# Altium PCB Motor1.PcbDoc (part 2 of 2)
Units mm, origin at the board's own origin, x right, y up, seen from the top; angles counter-clockwise.
Board outline 127 x 101.6 mm, 4 copper layers (Top Layer, Internal Plane 1, Internal Plane 2, Bottom Layer), stack 0.462 mm thick; 168 components, 160 nets, 542 pads, 14 vias.
Unrouted connection lines stored in the file: 162.
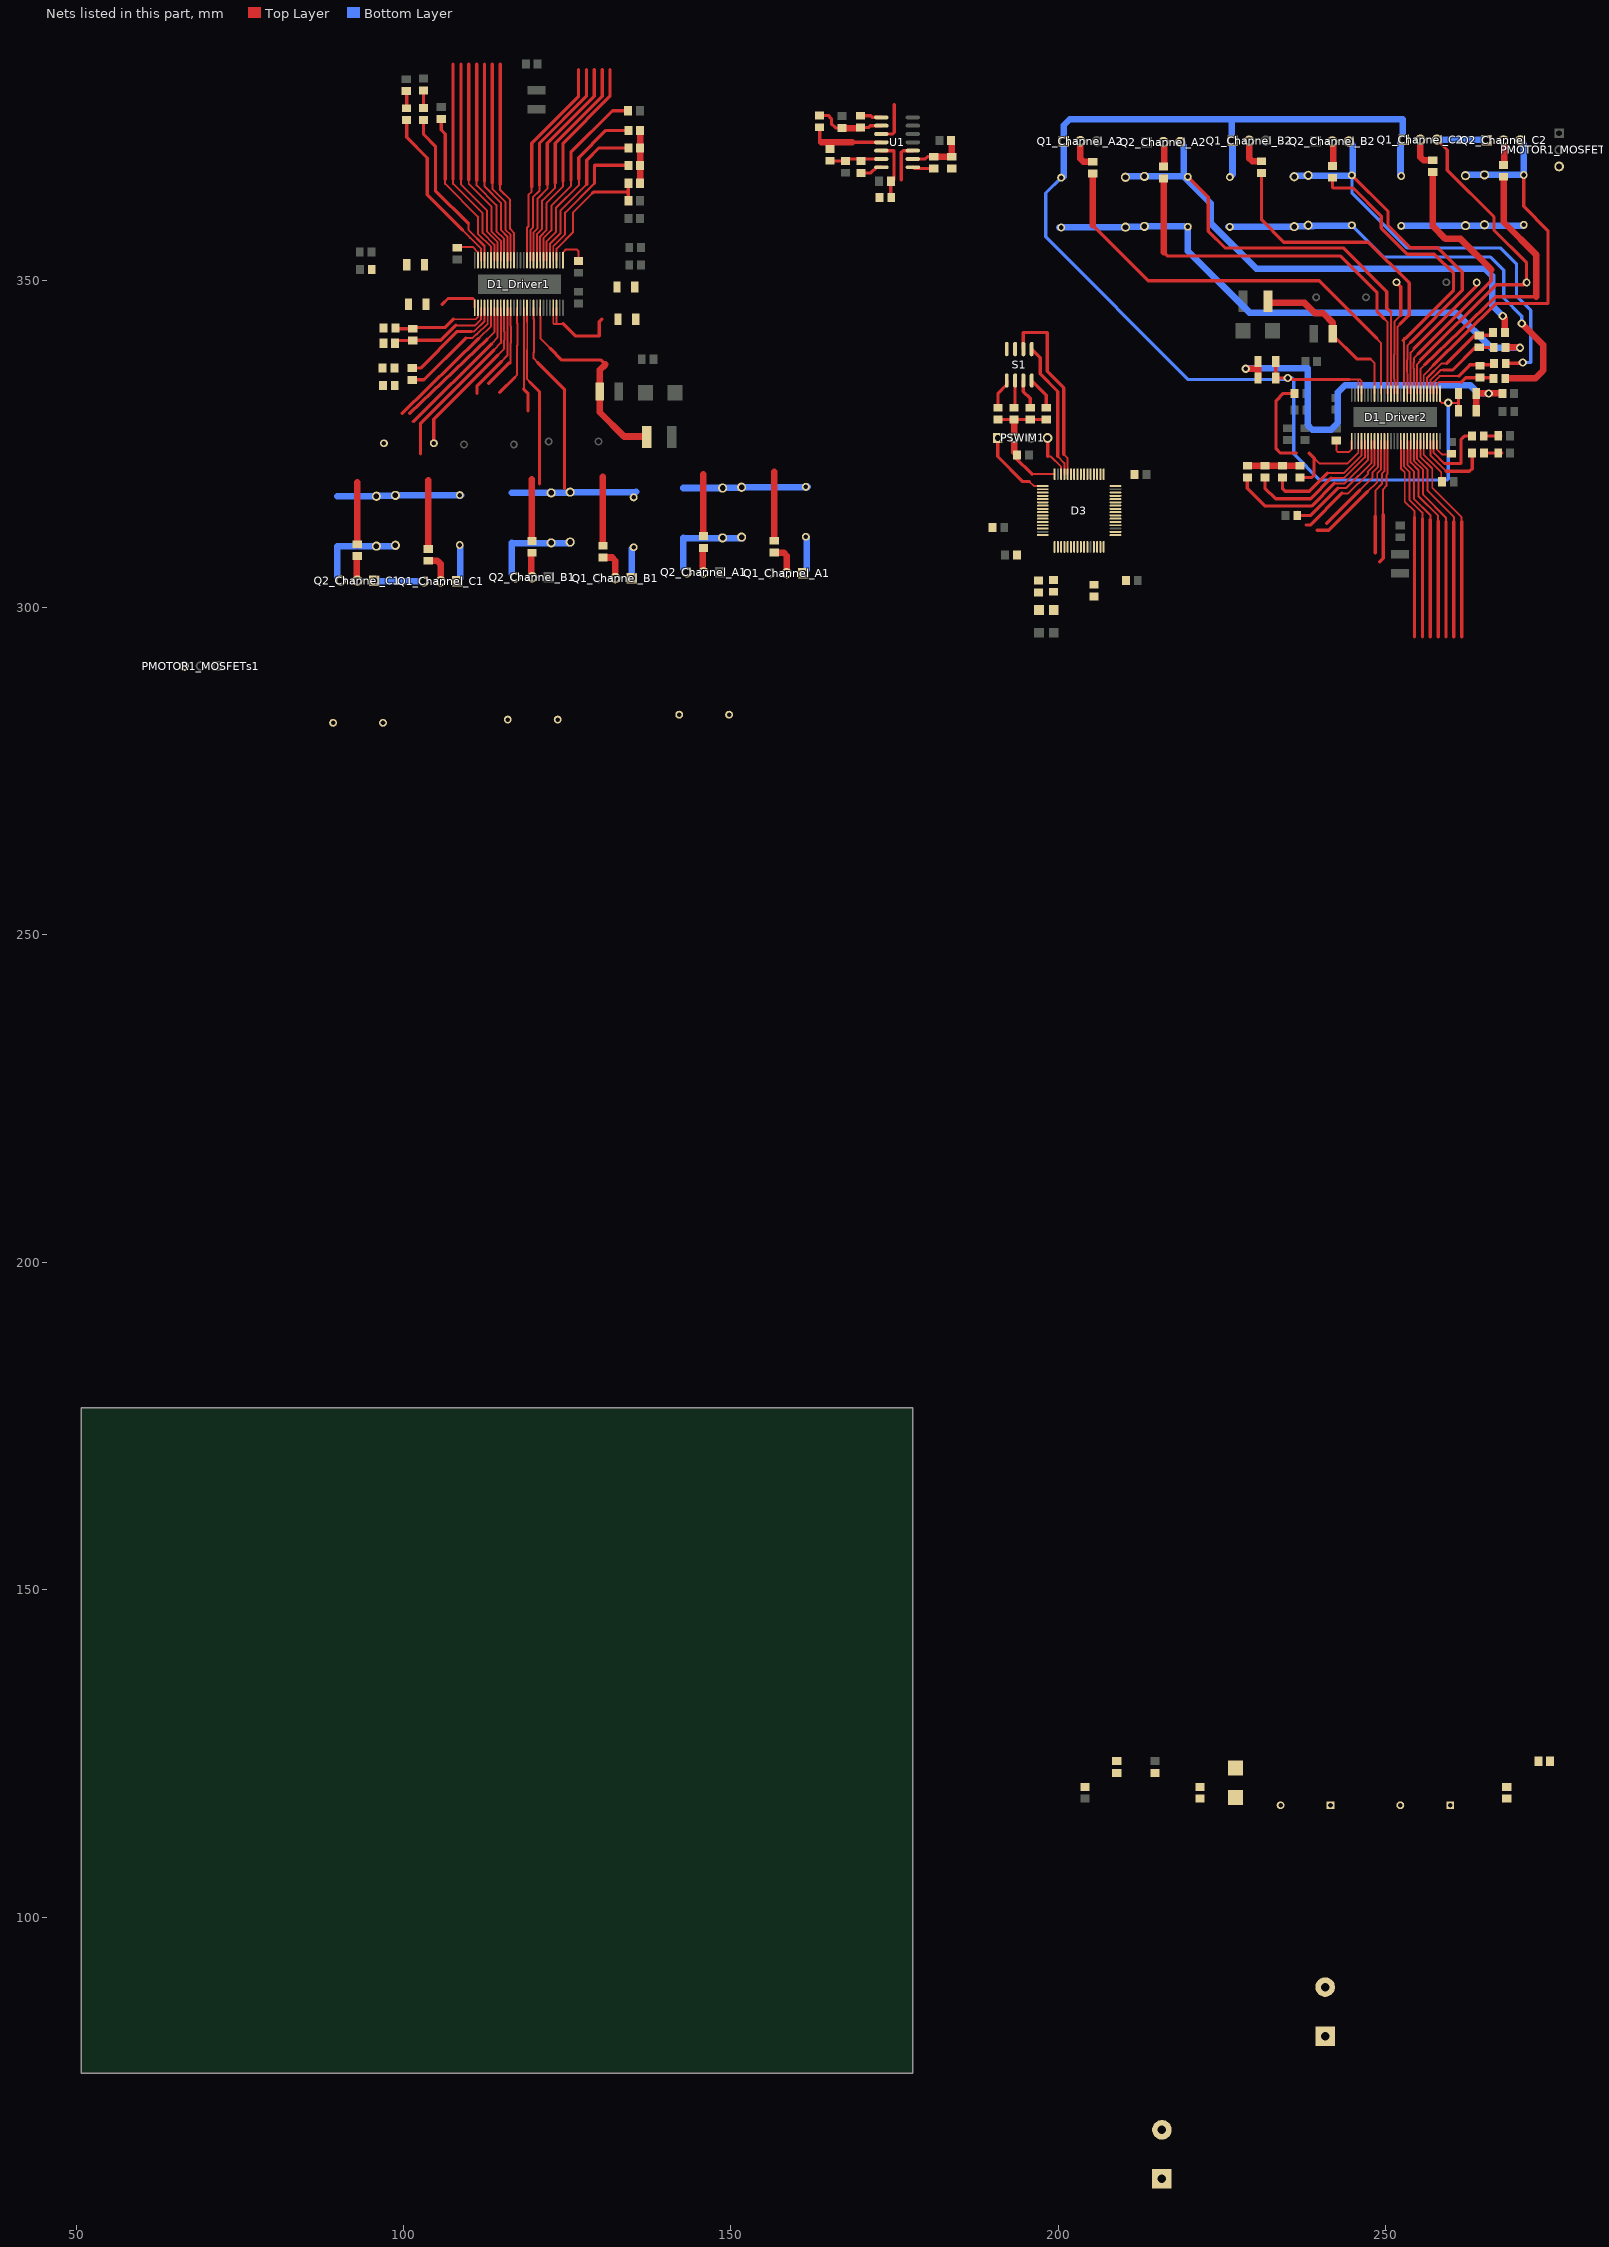
[diagram p4: the nets of this part, all layers, seen from the top]

## Via types
v1: diameter 1.27, hole 0.711, Top Layer to Bottom Layer, 12 vias
v2: diameter 0.5, hole 0.2, Top Layer to Bottom Layer, 2 vias

## Nets (pads, with @x,y where several pads share a name; then routed paths per layer and width w, separated by ;. In a path a pad name is that pad's centre, name@x,y a point inside that pad or via, vN(x,y) a via of type N, cw(c..) or ccw(c..) an arc to the next point about the centre after c; other vN are vias at no path point) (continued)
NetC13_Driver2_2: C13_Driver2.2 D1_Driver2.43 | length 17.8
  Top Layer w0.3: D1_Driver2.43@251.295,332.65 251.295,334.843 251.28,334.858 251.28,335.209 251.263,335.225 251.263,338.621 251.295,338.653 251.295,343.657 252.207,344.569
  Top Layer w0.5: C13_Driver2.2@251.42,349.75 251.895,349.275 251.97,349.275 252.27,348.975 252.27,344.632
NetC14_Driver1_1: C14_Driver1.1 D1_Driver1.36 PMOTOR1_MOSFETs1.3 Q1_Channel_C1.3 Q2_Channel_C1.1 | length 30.4
  Top Layer w0.3: 113.403,340.192 114.371,341.287 D1_Driver1.36@114.371,345.761
  Top Layer w0.5: 101.465,328.381 113.403,340.192
  Bottom Layer w1: Q2_Channel_C1.1@95.51,304.109 95.637,303.982 Q1_Channel_C1.3@103.13,303.982
NetC14_Driver1_2: C14_Driver1.2 D1_Driver1.38 | length 25.2
  Top Layer w0.3: 114.419,338.541 115.371,339.493 115.371,340.794 115.403,340.825 115.403,342.15 115.386,342.167 115.386,342.518 115.371,342.533 D1_Driver1.38@115.371,345.761
  Top Layer w0.5: C14_Driver1.2@104.64,325.079 104.64,328.762 114.419,338.541
NetC14_Driver2_1: C14_Driver2.1 D1_Driver2.36 PMOTOR1_MOSFETs2.3 Q1_Channel_C2.3 Q2_Channel_C2.1 | length 61.5
  Top Layer w0.3: D1_Driver2.36@254.795,332.65 254.795,337.124 255.763,338.219
  Top Layer w0.5: 255.313,337.844 266.881,349.289 271.006,349.289 C14_Driver2.1@271.045,349.25 ; Q1_Channel_C2.3@257.818,371.435 259.4,369.853 259.4,366.75 266.525,359.625 266.525,357.575 271.495,352.605 C14_Driver2.1@271.495,349.625
  Bottom Layer w1: Q1_Channel_C2.3@257.818,371.435 265.311,371.435 Q2_Channel_C2.1@265.438,371.308
NetC14_Driver2_2: C14_Driver2.2 D1_Driver2.38 | length 21.5
  Top Layer w0.3: D1_Driver2.38@253.795,332.65 253.795,335.878 253.78,335.893 253.78,336.244 253.763,336.261 253.763,337.586 253.795,337.617 253.795,338.918 254.747,339.87
  Top Layer w0.5: 254.297,339.495 C14_Driver2.2@264.076,349.274
NetC15_Driver1_2: C15_Driver1.2 D1_Driver1.23 | length 24.7
  Top Layer w0.3: 106.371,365.369 106.371,364.694 111.371,359.694 111.371,357.069 113.371,355.069 D1_Driver1.23@113.371,353.011
  Top Layer w0.5: C15_Driver1.2@105.759,374.606 105.759,372.906 106.371,372.294 106.371,365.369
NetC15_Driver2_2: C15_Driver2.2 D1_Driver2.23 | length 7.8
  Top Layer w0.3: D1_Driver2.23@255.795,325.4 255.795,323.342 258.47,320.667 C15_Driver2.2@258.47,318.717
NetC16_Driver1_1: C16_Driver1.1 D1_Driver1.32 R16_Driver1.2 | length 16
  Top Layer w0.3: 110.38,342.152 110.805,342.152 112.371,343.718 D1_Driver1.32@112.371,345.761
  Top Layer w0.5: C16_Driver1.1@101.334,336.556 102.609,336.556 108.205,342.152 110.38,342.152
NetC16_Driver1_2: C16_Driver1.2 D1_Driver1.33 R13_Driver1.2 | length 17.5
  Top Layer w0.3: 109.509,341.131 110.534,341.131 111.088,341.685 111.213,341.685 112.871,343.343 D1_Driver1.33@112.871,345.761
  Top Layer w0.5: C16_Driver1.2@101.334,334.756 103.134,334.756 109.509,341.131
NetC16_Driver2_1: C16_Driver2.1 D1_Driver2.32 R16_Driver2.2 | length 13.8
  Top Layer w0.3: D1_Driver2.32@256.795,332.65 256.795,334.693 258.361,336.259 258.786,336.259
  Top Layer w0.5: 258.786,336.259 260.204,336.259 263.645,339.7 R16_Driver2.2@266.495,339.7
NetC16_Driver2_2: C16_Driver2.2 D1_Driver2.33 R13_Driver2.2 | length 15.3
  Top Layer w0.3: D1_Driver2.33@256.295,332.65 256.295,335.036 258.539,337.28 259.325,337.28
  Top Layer w0.5: 259.325,337.28 263.595,341.55 R13_Driver2.2@266.545,341.55
NetC17_Driver1_1: C17_Driver1.1 D1_Driver1.30 R18_Driver1.2 | length 14
  Top Layer w0.3: 107.613,344.006 111.059,344.006 111.371,344.318 D1_Driver1.30@111.371,345.761
  Top Layer w0.5: R18_Driver1.2@99.334,342.556 C17_Driver1.1@101.409,342.556 ; C17_Driver1.1@101.534,342.756 106.363,342.756 107.613,344.006
NetC17_Driver1_2: C17_Driver1.2 D1_Driver1.31 R17_Driver1.2 | length 15.5
  Top Layer w0.3: 108.009,343.081 110.934,343.081 111.871,344.018 D1_Driver1.31@111.871,345.761
  Top Layer w0.5: R17_Driver1.2@99.334,340.756 C17_Driver1.2@101.409,340.756 ; C17_Driver1.2@101.534,340.781 105.709,340.781 108.009,343.081
NetC17_Driver2_1: C17_Driver2.1 D1_Driver2.30 R18_Driver2.2 | length 10.2
  Top Layer w0.3: D1_Driver2.30@257.795,332.65 257.795,334.093 258.107,334.405 261.553,334.405
  Top Layer w0.5: 261.553,334.405 262.228,335.08 ; 262.195,335.08 262.228,335.08 ; R18_Driver2.2@266.07,335.08 262.228,335.08
NetC17_Driver2_2: C17_Driver2.2 D1_Driver2.31 R17_Driver2.2 | length 11.8
  Top Layer w0.3: D1_Driver2.31@257.295,332.65 257.295,334.393 258.232,335.33 261.157,335.33
  Top Layer w0.5: 261.157,335.33 262.882,337.055 ; 262.82,337.055 262.882,337.055 ; R17_Driver2.2@266.195,337.055 262.882,337.055
NetC18_Driver1_2: C18_Driver1.2 D3.9 R15_Driver1.2 | length 2.6
  Top Layer w0.5: C18_Driver1.2@100.434,378.856 100.484,378.806 R15_Driver1.2@100.484,376.231
NetC18_Driver2_2: C18_Driver2.2 D3.17 R15_Driver2.2 | length 2.6
  Top Layer w0.5: R15_Driver2.2@264.965,326.162 267.54,326.162 C18_Driver2.2@267.59,326.212
NetC19_Driver1_2: C19_Driver1.2 D3.8 R14_Driver1.2 | length 2.7
  Top Layer w0.5: R14_Driver1.2@103.059,376.256 C19_Driver1.2@103.059,378.956
NetC19_Driver2_2: C19_Driver2.2 D3.11 R14_Driver2.2 | length 2.7
  Top Layer w0.5: R14_Driver2.2@264.99,323.587 C19_Driver2.2@267.69,323.587
NetC20_Driver1_2: C20_Driver1.2 D1_Driver1.27 | length 4.8
  Top Layer w0.3: C20_Driver1.2@108.209,354.931 108.328,355.05 110.59,355.05 111.371,354.269 D1_Driver1.27@111.371,353.011
NetC20_Driver2_2: C20_Driver2.2 D1_Driver2.27 | length 3.8
  Top Layer w0.3: D1_Driver2.27@257.795,325.4 257.795,324.142 258.576,323.361 C20_Driver2.2@260.045,323.361
NetC23_1: C23.1 R22.1
NetC27_2: C27.2 D3.22 D4.1
NetD1_Driver1_1: D1_Driver1.1 R10_Driver1.1 | length 5.4
  Top Layer w0.3: D1_Driver1.1@124.371,353.011 124.371,354.235 124.817,354.681 126.468,354.681 126.722,354.427 R10_Driver1.1@126.722,352.914
NetD1_Driver1_3: D1_Driver1.3 R6_Driver1.1 R11_Driver1.2 | length 20.8
  Top Layer w0.3: D1_Driver1.3@123.371,353.011 123.371,354.793 125.909,357.331 125.909,360.331 128.909,363.331
  Top Layer w0.5: 128.909,363.331 129.009,363.431 134.34,363.431 ; R11_Driver1.2@134.34,362.101 134.34,363.431 ; R6_Driver1.1@134.34,364.787 134.34,363.431
NetD1_Driver1_4: D1_Driver1.4 R9_Driver1.1 | length 22.3
  Top Layer w0.3: D1_Driver1.4@122.871,353.011 122.871,355.168 124.671,356.968 124.671,360.293 129.171,364.793
  Top Layer w0.5: 129.171,364.793 129.171,367.531 134.281,367.531 R9_Driver1.1@134.34,367.472
NetD1_Driver1_5: D1_Driver1.5 D3.5 R8_Driver1.1 | length 24.7
  Top Layer w0.3: D1_Driver1.5@122.371,353.011 122.371,355.5 123.971,357.1 123.971,360.593 127.971,364.593
  Top Layer w0.5: 127.971,364.593 127.971,368.293 129.835,370.157 R8_Driver1.1@134.34,370.157
NetD1_Driver1_6: D1_Driver1.6 D3.6 R7_Driver1.1 | length 27
  Top Layer w0.3: D1_Driver1.6@121.871,353.011 121.871,355.893 123.271,357.293 123.271,360.993 126.771,364.493 126.771,365.431
  Top Layer w0.5: 126.771,365.431 126.771,368.693 130.92,372.842 R7_Driver1.1@134.34,372.842
NetD1_Driver1_7: D1_Driver1.7 R12_Driver1.1 | length 29.6
  Top Layer w0.3: D1_Driver1.7@121.371,353.011 121.371,356.368 122.571,357.568 122.571,361.343 125.571,364.343 125.571,365.231
  Top Layer w0.5: 125.571,365.231 125.571,369.493 131.917,375.839 R12_Driver1.1@134.304,375.839
NetD1_Driver1_8: D1_Driver1.8 D3.54 | length 33.5
  Top Layer w0.3: D1_Driver1.8@120.871,353.011 120.871,356.643 121.871,357.643 121.871,361.793 124.371,364.293 124.371,365.031
  Top Layer w0.5: 124.371,365.031 124.371,370.906 131.534,378.069 131.534,382.131
NetD1_Driver1_9: D1_Driver1.9 D1_Driver2.9 D3.57 | length 49
  Top Layer w0.3: D1_Driver1.9@120.371,353.011 120.371,356.993 121.171,357.793 121.171,362.118 123.171,364.118 123.171,364.831 ; 245.995,317.875 247.995,319.875 247.995,320.618 248.795,321.418 D1_Driver2.9@248.795,325.4
  Top Layer w0.5: 123.171,364.831 123.171,370.906 130.334,378.069 130.334,382.131 ; 240.995,312.875 245.995,317.875
NetD1_Driver1_10: D1_Driver1.10 D1_Driver2.10 D3.56 | length 51.7
  Top Layer w0.3: D1_Driver1.10@119.871,353.011 119.871,357.293 120.471,357.893 120.471,362.443 121.971,363.943 121.971,364.631 ; 247.195,317.65 248.695,319.15 248.695,320.518 249.295,321.118 D1_Driver2.10@249.295,325.4
  Top Layer w0.5: 121.971,364.631 121.971,370.906 129.134,378.069 129.134,382.131 ; 239.545,311.775 241.32,311.775 247.195,317.65
NetD1_Driver1_11: D1_Driver1.11 D1_Driver2.11 D3.55 | length 50.3
  Top Layer w0.3: D1_Driver1.11@119.371,353.011 119.371,357.593 119.771,357.993 119.771,362.643 120.771,363.643 120.771,364.431 ; 248.395,313.98 248.395,317.85 249.395,318.85 249.395,320.418 249.795,320.818 D1_Driver2.11@249.795,325.4
  Top Layer w0.5: 120.771,364.431 120.771,370.906 127.934,378.069 127.934,382.131 ; 248.395,308.3 248.395,313.98
NetD1_Driver1_12: D1_Driver1.12 D3.62 | length 32.4
  Top Layer w0.3: D1_Driver1.12@118.871,353.011 118.871,357.993 119.071,358.193 119.071,362.993 119.571,363.493 119.571,364.231
  Top Layer w0.5: 119.571,364.231 119.571,370.906 126.734,378.069 126.734,382.131
NetD1_Driver1_16: D1_Driver1.16 D3.4 | length 30.8
  Top Layer w0.3: 114.771,364.631 114.771,363.744 116.271,362.244 116.271,357.794 116.871,357.194 D1_Driver1.16@116.871,353.011
  Top Layer w0.5: 114.771,364.631 114.771,382.931
NetD1_Driver1_17: D1_Driver1.17 D3.41 | length 31.1
  Top Layer w0.3: 113.571,364.831 113.571,363.944 115.571,361.944 115.571,357.694 116.371,356.894 D1_Driver1.17@116.371,353.011
  Top Layer w0.5: 113.571,364.831 113.571,382.931
NetD1_Driver1_18: D1_Driver1.18 D3.34 | length 31.4
  Top Layer w0.3: 112.371,365.031 112.371,364.294 114.871,361.794 114.871,357.644 115.871,356.644 D1_Driver1.18@115.871,353.011
  Top Layer w0.5: 112.371,365.031 112.371,382.931
NetD1_Driver1_19: D1_Driver1.19 D3.42 | length 31.7
  Top Layer w0.3: 111.171,365.231 111.171,364.444 114.171,361.444 114.171,357.469 115.371,356.269 D1_Driver1.19@115.371,353.011
  Top Layer w0.5: 111.171,365.231 111.171,382.931
NetD1_Driver1_20: D1_Driver1.20 D3.35 | length 31.9
  Top Layer w0.3: 109.971,365.294 109.971,364.694 113.471,361.194 113.471,357.394 114.871,355.994 D1_Driver1.20@114.871,353.011
  Top Layer w0.5: 109.971,365.294 109.971,382.931
NetD1_Driver1_21: D1_Driver1.21 D3.43 | length 32.2
  Top Layer w0.3: 108.771,365.344 108.771,364.594 112.771,360.594 112.771,357.381 114.371,355.781 D1_Driver1.21@114.371,353.011
  Top Layer w0.5: 108.771,365.344 108.771,382.931
NetD1_Driver1_22: D1_Driver1.22 D3.36 | length 32.5
  Top Layer w0.3: 107.571,365.344 107.571,364.669 112.071,360.169 112.071,357.194 113.871,355.394 D1_Driver1.22@113.871,353.011
  Top Layer w0.5: 107.571,365.344 107.571,382.931
NetD1_Driver1_24: D1_Driver1.24
NetD1_Driver1_25: D1_Driver1.25 R14_Driver1.1 | length 25.3
  Top Layer w0.3: 109.934,358.556 109.934,357.631 112.371,355.194 D1_Driver1.25@112.371,353.011
  Top Layer w0.5: R14_Driver1.1@103.059,374.456 103.059,372.256 104.884,370.431 104.884,363.606 109.934,358.556
NetD1_Driver1_26: D1_Driver1.26 R15_Driver1.1 | length 26.2
  Top Layer w0.3: 108.984,357.656 110.209,356.431 110.187,356.431 111.871,354.747 D1_Driver1.26@111.871,353.011
  Top Layer w0.5: R15_Driver1.1@100.484,374.431 100.484,371.781 103.634,368.631 103.634,363.006 108.984,357.656
NetD1_Driver1_35: D1_Driver1.35 R2_Channel_C1.1 | length 31.2
  Top Layer w0.3: 112.768,340.954 113.871,342.057 D1_Driver1.35@113.871,345.761
  Top Layer w0.5: 100.957,329.651 112.768,340.954
  Top Layer w1: R2_Channel_C1.1@92.925,309.525 92.925,319.075
NetD1_Driver1_37: D1_Driver1.37 R1_Channel_C1.1 | length 38
  Top Layer w0.3: 113.784,339.303 114.871,340.39 114.871,341.001 114.903,341.033 114.903,341.943 114.886,341.96 114.886,342.311 114.871,342.326 D1_Driver1.37@114.871,345.761
  Top Layer w0.5: 102.608,323.428 102.608,328.127 113.784,339.303
  Top Layer w1: R1_Channel_C1.1@103.775,308.925 103.775,319.45
NetD1_Driver1_40: D1_Driver1.40 R2_Channel_B1.1 | length 22.7
  Top Layer w0.3: 116.07,337.271 116.371,337.271 116.371,340.38 116.403,340.411 116.403,342.565 116.386,342.581 116.386,342.932 116.371,342.947 D1_Driver1.40@116.371,345.761
  Top Layer w0.5: 113.022,334.223 116.07,337.271
  Top Layer w1: R2_Channel_B1.1@119.6,310.025 119.6,319.575
NetD1_Driver1_42: D1_Driver1.42 R1_Channel_B1.1 | length 24.6
  Top Layer w0.3: 116.959,335.112 117.371,335.524 117.371,339.965 117.403,339.997 117.403,342.979 117.386,342.995 117.386,343.346 117.371,343.361 D1_Driver1.42@117.371,345.761
  Top Layer w0.5: 114.673,332.826 116.959,335.112
  Top Layer w1: R1_Channel_B1.1@130.45,309.425 130.45,319.95
NetD1_Driver1_45: D1_Driver1.45 R2_Channel_A1.1 | length 37.3
  Top Layer w0.3: D1_Driver1.45@118.871,345.761 118.871,343.983 118.886,343.968 118.886,343.617 118.903,343.6 118.903,339.376 118.871,339.344 118.871,334.851 119.372,334.35
  Top Layer w0.5: 119.372,334.35 120.769,332.953 120.769,318.856
  Top Layer w1: R2_Channel_A1.1@145.775,310.775 145.775,320.325
NetD1_Driver1_47: D1_Driver1.47 R1_Channel_A1.1 | length 40
  Top Layer w0.3: D1_Driver1.47@119.871,345.761 119.871,344.397 119.886,344.382 119.886,344.031 119.903,344.014 119.903,338.961 119.871,338.93 119.871,338.042 120.515,337.398
  Top Layer w0.5: 120.515,337.398 124.579,333.334 124.579,318.221
  Top Layer w1: R1_Channel_A1.1@156.625,310.175 156.625,320.7
NetD1_Driver2_1: D1_Driver2.1 R10_Driver2.1 | length 5.4
  Top Layer w0.3: R10_Driver2.1@242.444,325.497 242.444,323.984 242.698,323.73 244.349,323.73 244.795,324.176 D1_Driver2.1@244.795,325.4
NetD1_Driver2_3: D1_Driver2.3 R6_Driver2.1 R11_Driver2.2 | length 29.5
  Top Layer w0.3: 239.095,322.775 239.92,321.95 244.127,321.95 245.795,323.618 D1_Driver2.3@245.795,325.4
  Top Layer w0.5: R11_Driver2.2@236.045,332.675 234.345,332.675 233.245,331.575 233.245,324.2 233.845,323.6 236.37,323.6 ; R6_Driver2.1@236.919,319.844 238.689,319.844 239.045,320.2 239.045,322.775 ; 238.295,323.525 239.045,322.775 ; 239.095,322.775 239.045,322.775
NetD1_Driver2_4: D1_Driver2.4 R9_Driver2.1 | length 18.4
  Top Layer w0.3: 241.095,320.5 243.552,320.5 246.295,323.243 D1_Driver2.4@246.295,325.4
  Top Layer w0.5: R9_Driver2.1@234.234,319.844 234.234,318.136 234.645,317.725 238.32,317.725 241.095,320.5
NetD1_Driver2_5: D1_Driver2.5 D3.30 R8_Driver2.1 | length 22.6
  Top Layer w0.3: 241.695,319.775 243.659,319.775 246.795,322.911 D1_Driver2.5@246.795,325.4
  Top Layer w0.5: R8_Driver2.1@231.549,319.844 231.549,318.221 233.17,316.6 238.52,316.6 241.695,319.775
NetD1_Driver2_6: D1_Driver2.6 D3.29 R7_Driver2.1 | length 27
  Top Layer w0.3: 242.145,318.95 243.727,318.95 247.295,322.518 D1_Driver2.6@247.295,325.4
  Top Layer w0.5: R7_Driver2.1@228.864,319.844 228.864,318.181 231.57,315.475 238.67,315.475 242.145,318.95
NetD1_Driver2_7: D1_Driver2.7 R12_Driver2.1 | length 18.2
  Top Layer w0.3: 242.72,318.25 244.002,318.25 247.795,322.043 D1_Driver2.7@247.795,325.4
  Top Layer w0.5: R12_Driver2.1@236.52,314.55 237.045,314.025 238.495,314.025 242.72,318.25
NetD1_Driver2_8: D1_Driver2.8 D3.53 | length 18.1
  Top Layer w0.3: 243.295,317.425 244.27,317.425 247.295,320.45 247.295,320.768 248.295,321.768 D1_Driver2.8@248.295,325.4
  Top Layer w0.5: 237.845,312.575 238.445,312.575 243.295,317.425
NetD1_Driver2_12: D1_Driver2.12 D3.50 | length 18.9
  Top Layer w0.3: 249.595,314.18 249.595,318.05 250.095,318.55 250.095,320.218 250.295,320.418 D1_Driver2.12@250.295,325.4
  Top Layer w0.5: 249.065,306.975 249.595,307.505 249.595,314.18
NetD1_Driver2_16: D1_Driver2.16 D3.28 | length 30.8
  Top Layer w0.3: D1_Driver2.16@252.295,325.4 252.295,321.217 252.895,320.617 252.895,316.167 254.395,314.667 254.395,313.78
  Top Layer w0.5: 254.395,295.48 254.395,313.78
NetD1_Driver2_17: D1_Driver2.17 D3.37 | length 31.1
  Top Layer w0.3: D1_Driver2.17@252.795,325.4 252.795,321.517 253.595,320.717 253.595,316.467 255.595,314.467 255.595,313.58
  Top Layer w0.5: 255.595,295.48 255.595,313.58
NetD1_Driver2_18: D1_Driver2.18 D3.23 | length 31.4
  Top Layer w0.3: D1_Driver2.18@253.295,325.4 253.295,321.767 254.295,320.767 254.295,316.617 256.795,314.117 256.795,313.38
  Top Layer w0.5: 256.795,295.48 256.795,313.38
NetD1_Driver2_19: D1_Driver2.19 D3.38 | length 31.7
  Top Layer w0.3: D1_Driver2.19@253.795,325.4 253.795,322.142 254.995,320.942 254.995,316.967 257.995,313.967 257.995,313.18
  Top Layer w0.5: 257.995,295.48 257.995,313.18
NetD1_Driver2_20: D1_Driver2.20 D3.26 | length 31.9
  Top Layer w0.3: D1_Driver2.20@254.295,325.4 254.295,322.417 255.695,321.017 255.695,317.217 259.195,313.717 259.195,313.117
  Top Layer w0.5: 259.195,295.48 259.195,313.117
NetD1_Driver2_21: D1_Driver2.21 D3.39 | length 32.2
  Top Layer w0.3: D1_Driver2.21@254.795,325.4 254.795,322.63 256.395,321.03 256.395,317.817 260.395,313.817 260.395,313.067
  Top Layer w0.5: 260.395,295.48 260.395,313.067
NetD1_Driver2_22: D1_Driver2.22 D3.27 | length 32.5
  Top Layer w0.3: D1_Driver2.22@255.295,325.4 255.295,323.017 257.095,321.217 257.095,318.242 261.595,313.742 261.595,313.067
  Top Layer w0.5: 261.595,295.48 261.595,313.067
NetD1_Driver2_24: D1_Driver2.24
NetD1_Driver2_25: D1_Driver2.25 R14_Driver2.1 | length 12.2
  Top Layer w0.3: D1_Driver2.25@256.795,325.4 256.795,323.217 259.232,320.78
  Top Layer w0.5: 259.232,320.78 262.775,320.78 263.19,321.195 R14_Driver2.1@263.19,323.587 ; R14_Driver2.1@262.915,323.712 R14_Driver2.1@262.915,323.785
NetD1_Driver2_26: D1_Driver2.26 R15_Driver2.1 | length 12.2
  Top Layer w0.3: D1_Driver2.26@257.295,325.4 257.295,323.642 258.957,321.98
  Top Layer w0.5: 258.979,321.98 261.495,321.98 261.495,325.65 262.007,326.162 R15_Driver2.1@263.165,326.162
NetD1_Driver2_35: D1_Driver2.35 R2_Channel_C2.1 | length 46.9
  Top Layer w0.3: D1_Driver2.35@255.295,332.65 255.295,336.354 256.398,337.457
  Top Layer w0.5: 255.948,337.082 266.764,347.433 272.995,347.433
  Top Layer w1: R2_Channel_C2.1@267.998,365.767 267.998,358.827 272.995,353.83 272.995,347.433
NetD1_Driver2_37: D1_Driver2.37 R1_Channel_C2.1 | length 44.4
  Top Layer w0.3: D1_Driver2.37@254.295,332.65 254.295,336.085 254.28,336.1 254.28,336.451 254.263,336.468 254.263,337.378 254.295,337.41 254.295,338.021 255.382,339.108
  Top Layer w0.5: 254.932,338.733 266.108,349.909 266.108,351.592
  Top Layer w1: R1_Channel_C2.1@257.173,366.492 257.173,358.227 259.125,356.275 261.425,356.275 266.108,351.592
NetD1_Driver2_40: D1_Driver2.40 R2_Channel_B2.1 | length 48.7
  Top Layer w0.3: D1_Driver2.40@252.795,332.65 252.795,335.464 252.78,335.479 252.78,335.83 252.763,335.846 252.763,338 252.795,338.031 252.795,340.914 252.795,341.14 253.021,341.14 253.096,341.14
  Top Layer w0.5: R2_Channel_B2.1@241.853,365.611 241.853,364.172 241.975,364.05 245,364.05 249.3,359.75 249.3,357.925 253.3,353.925 257.425,353.925 260.345,351.005 260.345,348.464 253.021,341.14 252.795,340.914 252.646,340.765
NetD1_Driver2_42: D1_Driver2.42 R1_Channel_B2.1 | length 51.4
  Top Layer w0.3: D1_Driver2.42@251.795,332.65 251.795,335.05 251.78,335.065 251.78,335.416 251.763,335.432 251.763,338.414 251.795,338.446 251.795,342.887 252.207,343.299
  Top Layer w0.5: R1_Channel_B2.1@231.028,366.336 231.028,359.172 234.425,355.775 247.35,355.775 253.577,349.548 253.577,344.668 ; 252.207,343.299 253.577,344.668 ; 253.577,344.618 253.577,344.668 ; 253.602,344.693 253.577,344.668
NetD1_Driver2_45: D1_Driver2.45 R2_Channel_A2.1 | length 62.7
  Top Layer w0.3: 249.794,344.061 250.295,343.56 250.295,339.067 250.263,339.035 250.263,334.811 250.28,334.794 250.28,334.443 250.295,334.428 D1_Driver2.45@250.295,332.65
  Top Layer w0.5: 216.1,354.25 216.7,353.65 243.1,353.65 248.67,348.08 248.67,345.185 249.794,344.061
  Top Layer w1: 216.1,354.25 R2_Channel_A2.1@216.1,365.65
NetD1_Driver2_47: D1_Driver2.47 R1_Channel_A2.1 | length 67.1
  Top Layer w0.3: 248.651,341.013 249.263,340.401 249.263,334.397 249.28,334.38 249.28,334.029 249.295,334.014 D1_Driver2.47@249.295,332.65
  Top Layer w0.5: 205.25,358.35 213.725,349.875 239.845,349.875 248.642,341.078
  Top Layer w1: 205.25,358.35 R1_Channel_A2.1@205.25,366.25
NetD3_2: D3.2 R38.2
NetD3_3: D3.3 R37.2
NetD3_10: D3.10 R25.2 U1.1 | length 3.3
  Top Layer w0.5: R25.2@169.8,375.075 171.35,375.075 171.59,374.835 U1.1@172.975,374.835
NetD3_14: D3.14
NetD3_15: D3.15
NetD3_16: D3.16
NetD3_20: D3.20
NetD3_21: D3.21
NetD3_24: D3.24 R33.2 U1.8 | length 3.3
  Top Layer w0.5: U1.8@177.775,367.215 177.965,367.025 R33.2@180.975,367.025
NetD3_25: D3.25 R26.2 U1.7 | length 3.5
  Top Layer w0.5: R26.2@169.85,366.35 171.375,366.35 172.24,367.215 U1.7@172.975,367.215
NetD3_33: D3.33 S1.8
NetD3_40: D3.40 S1.7
NetD3_44: D3.44 S1.6 | length 29.1
  Top Layer w0.3: 200.825,323.375 201.425,322.775 D3.44@201.425,320.35
  Top Layer w0.5: S1.6@194.66,339.45 194.66,341.935 194.7,341.975 198.3,341.975 198.3,336.05 200.825,333.525 200.825,323.375
NetD3_45: D3.45 S1.5 | length 21.2
  Top Layer w0.3: 199.9,323.075 200.925,322.05 D3.45@200.925,320.35
  Top Layer w0.5: S1.5@195.93,339.45 197.225,338.155 197.225,335.65 199.9,332.975 199.9,323.075
NetD3_46: D3.46 PSWIM1.4 | length 6.7
  Top Layer w0.3: 198.365,323.05 198.875,323.05 200.425,321.5 D3.46@200.425,320.35
  Top Layer w0.5: 198.365,323.05 PSWIM1.4@198.365,325.875
NetD3_49: D3.49 PSWIM1.1 | length 11.6
  Top Layer w0.3: 195.575,319.225 196.25,318.55 D3.49@197.625,318.55
  Top Layer w0.5: PSWIM1.1@190.745,325.875 190.745,323.05 194.57,319.225 195.575,319.225
NetD3_51: D3.51
NetD3_52: D3.52
NetD3_58: D3.58
NetD3_59: D3.59
NetD3_60: D3.60 R39.1
NetD3_61: D3.61
NetD5_1: D5.1 R37.1
NetD6_1: D6.1 R38.1
NetQ1_Channel_A1_2: Q1_Channel_A1.2 R1_Channel_A1.2 | length 4.8
  Top Layer w1: R1_Channel_A1.2@156.625,308.375 158.033,308.375 158.52,307.888 Q1_Channel_A1.2@158.52,305.232
NetQ1_Channel_A2_2: Q1_Channel_A2.2 R1_Channel_A2.2 | length 4.8
  Top Layer w1: Q1_Channel_A2.2@203.355,371.193 203.355,368.537 203.842,368.05 R1_Channel_A2.2@205.25,368.05
NetQ1_Channel_B1_2: Q1_Channel_B1.2 R1_Channel_B1.2 | length 4.8
  Top Layer w1: R1_Channel_B1.2@130.45,307.625 131.858,307.625 132.345,307.138 Q1_Channel_B1.2@132.345,304.482
NetQ1_Channel_B2_2: Q1_Channel_B2.2 R1_Channel_B2.2 | length 4.8
  Top Layer w1: Q1_Channel_B2.2@229.133,371.279 229.133,368.623 229.62,368.136 R1_Channel_B2.2@231.028,368.136
NetQ1_Channel_C1_2: Q1_Channel_C1.2 R1_Channel_C1.2 | length 4.8
  Top Layer w1: R1_Channel_C1.2@103.775,307.125 105.183,307.125 105.67,306.638 Q1_Channel_C1.2@105.67,303.982
NetQ1_Channel_C2_2: Q1_Channel_C2.2 R1_Channel_C2.2 | length 4.8
  Top Layer w1: Q1_Channel_C2.2@255.278,371.435 255.278,368.779 255.765,368.292 R1_Channel_C2.2@257.173,368.292
NetQ2_Channel_A1_2: Q2_Channel_A1.2 R2_Channel_A1.2 | length 3.8
  Top Layer w1: R2_Channel_A1.2@145.693,309.1 145.693,305.486 Q2_Channel_A1.2@145.82,305.359
NetQ2_Channel_A2_2: Q2_Channel_A2.2 R2_Channel_A2.2 | length 3.8
  Top Layer w1: Q2_Channel_A2.2@216.055,371.066 216.182,370.939 R2_Channel_A2.2@216.182,367.325
NetQ2_Channel_B1_2: Q2_Channel_B1.2 R2_Channel_B1.2 | length 3.8
  Top Layer w1: R2_Channel_B1.2@119.518,308.35 119.518,304.736 Q2_Channel_B1.2@119.645,304.609
NetQ2_Channel_B2_2: Q2_Channel_B2.2 R2_Channel_B2.2 | length 3.8
  Top Layer w1: Q2_Channel_B2.2@241.833,371.152 241.96,371.025 R2_Channel_B2.2@241.96,367.411
NetQ2_Channel_C1_2: Q2_Channel_C1.2 R2_Channel_C1.2 | length 3.8
  Top Layer w1: R2_Channel_C1.2@92.843,307.85 92.843,304.236 Q2_Channel_C1.2@92.97,304.109
NetQ2_Channel_C2_2: Q2_Channel_C2.2 R2_Channel_C2.2 | length 3.8
  Top Layer w1: Q2_Channel_C2.2@267.978,371.308 268.105,371.181 R2_Channel_C2.2@268.105,367.567
NetR21_2: R21.2 R23.1
NetR25_1: R25.1 R27.1 R30.2 U1.2 | length 10.8
  Top Layer w0.5: R27.1@163.55,375.125 164.85,375.125 165.35,374.625 165.35,373.875 166,373.225 R30.2@166.95,373.225 ; R25.1@169.8,373.275 171,373.275 171.29,373.565 U1.2@172.975,373.565
  Top Layer w1: R30.2@166.95,373.175 169.7,373.175 R25.1@169.8,373.275
NetR26_1: R26.1 R29.1 R32.2 U1.6 | length 7.5
  Top Layer w0.5: R29.1@165.125,368.2 165.15,368.175 R32.2@167.5,368.175 ; R32.2@167.84,368.485 U1.6@172.975,368.485
NetR28_1: R28.1 R31.2 U1.5 | length 8.9
  Top Layer w0.5: U1.5@172.975,369.755 174.895,369.755 R31.2@174.895,365.295 ; R31.2@174.425,365.075 174.425,362.625 R28.1@174.475,362.575
NetR33_1: R33.1 R34.1 R35.2 U1.9 | length 8
  Top Layer w0.5: U1.9@177.775,368.485 179.71,368.485 180.075,368.85 R33.1@180.725,368.85
  Top Layer w1: R33.1@180.975,368.825 R34.1@183.725,368.825 183.725,370.925 R35.2@183.675,370.975
NetR40_1: R40.1 S1.1 | length 4.7
  Top Layer w0.5: R40.1@190.8,330.5 190.8,332.725 192.12,334.045 S1.1@192.12,334.65
NetR41_1: R41.1 S1.2 | length 4.2
  Top Layer w0.5: R41.1@193.25,330.5 193.39,330.64 S1.2@193.39,334.65
NetR42_1: R42.1 S1.3 | length 4.6
  Top Layer w0.5: S1.3@194.66,334.65 194.66,332.965 195.7,331.925 R42.1@195.7,330.5
NetR43_1: R43.1 S1.4 | length 5.1
  Top Layer w0.5: S1.4@195.93,334.65 198.15,332.43 R43.1@198.15,330.5
PGND: C7_Driver1.1 C7_Driver2.1 C8_Driver1.1 C8_Driver2.1 C21_Driver1.1 C21_Driver2.1 C22_Driver1.1 C22_Driver2.1 C24.2 C25.2 C26.1 PPOWER?_Motor1.2 PPOWER?_Motor2.2 R20_Driver1.2 R20_Driver2.2 R22.2 | length 62.3
  Top Layer w1: v1(228.6,336.45) 230.4,336.45 230.5,336.55 C8_Driver2.1@230.5,335.025 ; C22_Driver2.1@263.82,330.025 C21_Driver2.1@263.82,332.675 v1(265.7,332.675) R20_Driver2.2@267.795,332.675
  Bottom Layer w1: v1(228.6,336.45) 228.7,336.55 238.05,336.55 238.05,327.875 238.775,327.15 241.65,327.15 242.675,328.175 242.675,332.825 243.8,333.95 262.875,333.95 264.15,332.675 v1(265.7,332.675)
PGND_Channel_C1: C1_Channel_C1.1 C2_Channel_C1.1 R3_Channel_C1.1 R4_Channel_C1.1 | length 19.1
  Bottom Layer w1: 89.875,316.985 R3_Channel_C1.1@95.875,316.985 ; R3_Channel_C1.1@95.875,317.035 R4_Channel_C1.1@98.925,317.035 ; R4_Channel_C1.1@98.775,317.11 C1_Channel_C1.1@108.8,317.11
PGND_Channel_C2: C1_Channel_C2.1 C2_Channel_C2.1 R3_Channel_C2.1 R4_Channel_C2.1 | length 18.8
  Bottom Layer w1: C1_Channel_C2.1@252.348,358.257 270.913,358.257 C2_Channel_C2.1@271.073,358.417
PVDD: C1_Channel_A1.2 C1_Channel_A2.2 C1_Channel_B1.2 C1_Channel_B2.2 C1_Channel_C1.2 C1_Channel_C2.2 C7_Driver1.2 C7_Driver2.2 C8_Driver1.2 C8_Driver2.2 C21_Driver1.2 C21_Driver2.2 C22_Driver1.2 C22_Driver2.2 C23.2 C24.1 C25.1 C26.2 D1_Driver1.29 D1_Driver1.53 D1_Driver1.54 D1_Driver2.29 D1_Driver2.53 D1_Driver2.54 PPOWER?_Motor1.1 PPOWER?_Motor2.1 Q1_Channel_A1.1 Q1_Channel_A2.1 Q1_Channel_B1.1 Q1_Channel_B2.1 Q1_Channel_C1.1 Q1_Channel_C2.1 R21.1 R28.2 | length 248.4
  Top Layer w0.3: 110.609,347.177 110.871,346.915 D1_Driver1.29@110.871,345.761 ; D1_Driver1.53@122.871,345.761 122.871,343.424 122.99,343.305 123.371,343.305 ; D1_Driver1.54@123.371,345.761 123.371,343.305 ; 124.387,343.305 123.371,343.305 ; 244.463,334.79 245.795,334.79 245.795,334.775 ; D1_Driver2.54@245.795,332.65 245.795,334.775 ; D1_Driver2.53@246.295,332.65 246.295,334.563 246.083,334.775 245.795,334.775 ; D1_Driver2.29@258.295,332.65 258.295,331.496 258.557,331.234 v1(259.525,331.234) 260.904,331.234 261.12,331.45
  Top Layer w0.5: 105.91,346.288 106.799,347.177 110.609,347.177 ; 124.387,343.305 126.23,341.462 129.913,341.462 129.913,343.621 130.294,344.002 ; C7_Driver2.2@233.2,337.55 C8_Driver2.2@233.2,335.025 v1(235.025,335.025) 235.34,335.025 235.575,334.79 244.463,334.79 ; C22_Driver2.2@261.12,330.025 261.12,331.45 C21_Driver2.2@261.12,332.675
  Bottom Layer w0.5: C1_Channel_A2.2@200.425,365.635 198.075,363.285 198.075,356.575 219.85,334.8 235.95,334.8 ; v1(235.025,335.025) 235.725,335.025 235.95,334.8 ; v1(259.525,331.234) 259.525,319.65 259.325,319.45 239.95,319.45 235.95,323.45 235.95,334.8
  Bottom Layer w1: Q1_Channel_C1.1@108.21,303.982 108.7,304.472 C1_Channel_C1.2@108.7,309.375 ; Q1_Channel_B1.1@134.885,304.482 134.885,308.927 C1_Channel_B1.2@135.143,309.185 ; Q1_Channel_A1.1@161.06,305.232 161.55,305.722 C1_Channel_A1.2@161.55,310.625 ; C1_Channel_A2.2@200.815,365.8 Q1_Channel_A2.1@200.815,371.193 200.815,373.615 201.75,374.55 226.45,374.55 ; C1_Channel_B2.2@226.368,365.886 226.593,366.111 Q1_Channel_B2.1@226.593,371.279 226.45,371.422 226.45,374.55 ; C1_Channel_C2.2@252.248,366.042 252.248,370.945 Q1_Channel_C2.1@252.738,371.435 252.6,371.573 252.6,374.55 226.45,374.55
R\S\T\: D3.7 R36.1
SN1_Motor1: C2_Channel_A1.2 D1_Driver1.44 Q2_Channel_A1.3 R3_Channel_A1.2 R4_Channel_A1.2 R13_Driver1.1 | length 30.6
  Top Layer w0.3: 118.371,333.349 118.371,339.551 118.403,339.583 118.403,343.393 118.386,343.41 118.386,343.761 118.371,343.776 D1_Driver1.44@118.371,345.761
  Top Layer w0.5: 118.371,333.349 119.002,332.718 119.002,330.032
  Bottom Layer w1: 142.725,310.615 142.725,310.565 ; Q2_Channel_A1.3@143.28,305.359 142.725,305.914 142.725,310.565 ; R4_Channel_A1.2@151.825,310.665 151.725,310.565 151.625,310.565 142.725,310.565
SN1_Motor2: C2_Channel_A2.2 D1_Driver2.44 Q2_Channel_A2.3 R3_Channel_A2.2 R4_Channel_A2.2 R13_Driver2.1 | length 135.8
  Top Layer w0.3: D1_Driver2.44@250.795,332.65 250.795,334.635 250.78,334.65 250.78,335.001 250.763,335.018 250.763,338.828 250.795,338.86 250.795,345.062
  Top Layer w0.5: C2_Channel_A2.2@219.773,365.747 222.875,362.645 222.875,357.475 225.45,354.9 243.5,354.9 250.164,348.236 250.164,345.718 ; 250.164,345.693 250.795,345.062
  Top Layer w1: v1(267.85,344.5) 268.195,344.155 R13_Driver2.1@268.195,341.975
  Bottom Layer w1: R4_Channel_A2.2@210.05,365.76 210.15,365.86 219.15,365.86 ; Q2_Channel_A2.3@218.595,371.066 219.15,370.511 219.15,365.86 ; v1(267.85,344.5) 266.26,346.09 266.26,350.61 265.2,351.671 265.2,351.725 230.25,351.725 223.25,358.725 223.25,361.71 219.15,365.81 219.15,365.86
SN2_Motor1: C2_Channel_B1.2 D1_Driver1.39 Q2_Channel_B1.3 R3_Channel_B1.2 R4_Channel_B1.2 R17_Driver1.1 | length 29.6
  Top Layer w0.3: 114.927,337.525 115.871,338.469 115.871,340.587 115.903,340.618 115.903,342.357 115.886,342.374 115.886,342.725 115.871,342.74 D1_Driver1.39@115.871,345.761
  Top Layer w0.5: 111.244,332.699 111.244,333.842 114.927,337.525
  Bottom Layer w1: 116.55,309.865 116.55,309.815 ; Q2_Channel_B1.3@117.105,304.609 116.55,305.164 116.55,309.815 ; R4_Channel_B1.2@125.65,309.915 125.55,309.815 125.45,309.815 116.55,309.815
SN2_Motor2: C2_Channel_B2.2 D1_Driver2.39 Q2_Channel_B2.3 R3_Channel_B2.2 R4_Channel_B2.2 R17_Driver2.1 | length 113.6
  Top Layer w0.3: D1_Driver2.39@253.295,332.65 253.295,335.671 253.28,335.686 253.28,336.037 253.263,336.054 253.263,337.793 253.295,337.824 253.295,339.942 254.239,340.886
  Top Layer w0.5: C2_Channel_B2.2@244.825,365.985 250.35,360.46 250.35,358.325 253.75,354.925 257.95,354.925 261.695,351.18 261.695,348.417 253.789,340.511 ; R17_Driver2.1@268.32,337.275 270.8,337.275 v1(270.925,337.4)
  Bottom Layer w0.5: C2_Channel_B2.2@244.825,365.985 244.825,365.946 244.825,363.3 253.225,354.9 267.475,354.9 269.975,352.4 269.975,347.525 272.15,345.35 272.15,337.4 v1(270.925,337.4)
  Bottom Layer w1: R4_Channel_B2.2@235.828,365.846 235.928,365.946 238.15,365.946 244.825,365.946 244.928,365.946 244.928,370.597 Q2_Channel_B2.3@244.373,371.152
SN3_Motor1: C2_Channel_C1.2 D1_Driver1.34 Q2_Channel_C1.3 R3_Channel_C1.2 R4_Channel_C1.2 U1.3 | length 42.7
  Top Layer w0.3: 111.498,341.081 113.371,342.954 D1_Driver1.34@113.371,345.761
  Top Layer w0.5: 99.814,329.651 111.498,341.081 ; U1.3@172.975,372.295 174.72,372.295 174.95,372.525 174.95,376.75
  Bottom Layer w1: 89.875,309.365 89.875,309.315 ; Q2_Channel_C1.3@90.43,304.109 89.875,304.664 89.875,309.315 ; R4_Channel_C1.2@98.975,309.415 98.875,309.315 89.875,309.315
SN3_Motor2: C2_Channel_C2.2 D1_Driver2.34 Q2_Channel_C2.3 R3_Channel_C2.2 R4_Channel_C2.2 U1.10 | length 68.7
  Top Layer w0.3: D1_Driver2.34@255.795,332.65 255.795,335.457 257.668,337.33
  Top Layer w0.5: 176.025,365.3 176.025,369.5 176.28,369.755 U1.10@177.775,369.755 ; 257.218,336.955 266.895,346.422 274.767,346.422 274.767,357.533 271.073,361.227 C2_Channel_C2.2@271.073,366.037
  Bottom Layer w1: R4_Channel_C2.2@261.973,366.002 262.073,366.102 C2_Channel_C2.2@271.073,366.102 ; Q2_Channel_C2.3@270.518,371.308 271.073,370.753 C2_Channel_C2.2@271.073,366.102 ; C2_Channel_C2.2@271.073,366.052 C2_Channel_C2.2@271.073,366.102
SP1_Motor1: C1_Channel_A1.1 C2_Channel_A1.1 R3_Channel_A1.1 R4_Channel_A1.1 R16_Driver1.1 | length 19.1
  Bottom Layer w1: 142.725,318.235 R3_Channel_A1.1@148.725,318.235 ; R3_Channel_A1.1@148.725,318.285 R4_Channel_A1.1@151.775,318.285 ; R4_Channel_A1.1@151.625,318.36 161.65,318.36 C1_Channel_A1.1@161.7,318.41
SP1_Motor2: C1_Channel_A2.1 C2_Channel_A2.1 R3_Channel_A2.1 R4_Channel_A2.1 R16_Driver2.1 | length 81.9
  Top Layer w1: R16_Driver2.1@268.295,339.7 270.475,339.7 v1(270.5,339.675)
  Bottom Layer w1: C1_Channel_A2.1@200.175,358.015 200.225,358.065 R4_Channel_A2.1@210.25,358.065 ; R4_Channel_A2.1@210.1,358.14 R3_Channel_A2.1@213.15,358.14 ; R3_Channel_A2.1@213.15,358.19 219.15,358.19 ; C2_Channel_A2.1@219.773,358.127 219.773,354.427 229.175,345.025 260.7,345.025 266.05,339.675 v1(270.5,339.675)
SP2_Motor1: C1_Channel_B1.1 C2_Channel_B1.1 R3_Channel_B1.1 R4_Channel_B1.1 R18_Driver1.1 | length 19.1
  Bottom Layer w1: 116.55,317.485 R3_Channel_B1.1@122.55,317.485 ; R3_Channel_B1.1@122.55,317.535 R4_Channel_B1.1@125.6,317.535 ; R4_Channel_B1.1@125.45,317.61 135.475,317.61 135.525,317.66
SP2_Motor2: C1_Channel_B2.1 C2_Channel_B2.1 R3_Channel_B2.1 R4_Channel_B2.1 R18_Driver2.1 | length 69.3
  Top Layer w1: R18_Driver2.1@268.245,334.975 272.825,334.975 274.05,336.2 274.05,340.075 v1(270.775,343.35)
  Bottom Layer w0.5: C2_Channel_B2.1@244.825,358.365 244.914,358.276 249.69,353.5 266,353.5 268.025,351.475 268.025,347.25 270.775,344.5 v1(270.775,343.35)
  Bottom Layer w1: C1_Channel_B2.1@225.953,358.101 226.003,358.151 R4_Channel_B2.1@236.028,358.151 ; R4_Channel_B2.1@235.878,358.226 238.928,358.226 ; 238.928,358.276 C2_Channel_B2.1@244.914,358.276
VCC: C10_Driver1.1 C10_Driver2.1 C28.2 C29.2 C30.2 C31.2 D1_Driver1.49 D1_Driver2.49 D3.1 D3.13 D3.18 D3.32 D3.48 D3.64 D4.2 L1_Driver1.2 L1_Driver2.2 PSWIM1.2 R6_Driver1.2 R6_Driver2.2 R7_Driver1.2 R7_Driver2.2 R8_Driver1.2 R8_Driver2.2 R9_Driver1.2 R9_Driver2.2 R27.2 R29.2 R34.2 R36.2 R40.2 R41.2 R42.2 R43.2 U1.4 | length 105.4
  Top Layer w0.3: D1_Driver1.49@120.871,345.761 120.871,344.811 120.886,344.796 120.886,344.445 120.903,344.428 120.903,341.074 122.42,339.557 ; 195.985,320.35 D3.48@199.425,320.35 ; 247.65,337.95 248.263,337.337 248.263,333.983 248.28,333.966 248.28,333.615 248.295,333.6 D1_Driver2.49@248.295,332.65
  Top Layer w0.5: 122.42,339.557 124.198,337.779 130.167,337.779 130.837,337.109 ; R27.2@163.55,373.325 163.55,371.25 163.775,371.025 ; 168.55,371.025 U1.4@172.975,371.025 ; R40.2@190.8,328.7 R41.2@193.25,328.7 R42.2@195.7,328.7 R43.2@198.15,328.7 ; C31.2@193.368,322.967 195.985,320.35 ; C10_Driver2.1@241.925,341.6 245.575,337.95 247.65,337.95
  Top Layer w1: 130.837,337.109 129.984,336.256 C10_Driver1.1@129.984,332.981 129.984,329.806 133.684,326.106 L1_Driver1.2@136.509,326.106 ; R6_Driver1.2@136.14,364.787 R9_Driver1.2@136.14,367.472 R8_Driver1.2@136.14,370.157 R7_Driver1.2@136.14,372.842 ; 163.775,371.025 168.55,371.025 ; R41.2@193.25,328.7 193.285,328.665 PSWIM1.2@193.285,325.875 193.285,323.715 C31.2@193.7,323.3 ; R7_Driver2.2@228.864,321.644 R8_Driver2.2@231.549,321.644 R9_Driver2.2@234.234,321.644 R6_Driver2.2@236.919,321.644 ; L1_Driver2.2@232.207,346.5 237.595,346.5 239.182,344.913 240.462,344.913 241.925,343.45 C10_Driver2.1@241.925,341.6
pads on no net: D1_Driver1.55 D1_Driver2.55 U1.12 U1.13 U1.14

## Keep-outs
Keep-Out Layer:
  lines w0.3: 52.1,77.5 176.5,77.5 176.5,176.5 52.1,176.5 52.1,77.5

## Silkscreen, mask and mechanical layers (free items; w line width, h text height)
Drill Drawing:
  text "Drill Drawing." at 182.88,78.74 h1.52
  text ".LEGEND" at 215.054,59.021 h1.52

## Dimensions
52.1,77.5 to 176.5,77.5 on Mechanical 1
52.1,77.5 to 52.1,176.5 on Mechanical 1

## Text inside footprints (layer, text, board x,y; h text height)
C24: Top Overlay "+" at 245.876,116.357 h1.5
C25: Top Overlay "+" at 264.164,116.357 h1.5